# Altium PCB dc driver pcb.PcbDoc
Units mm, origin at the board's own origin, x right, y up, seen from the top; angles counter-clockwise.
Board outline 38.61 x 32.64 mm, 2 copper layers (Top Layer, Bottom Layer); 16 components, 12 nets, 53 pads, 32 vias.
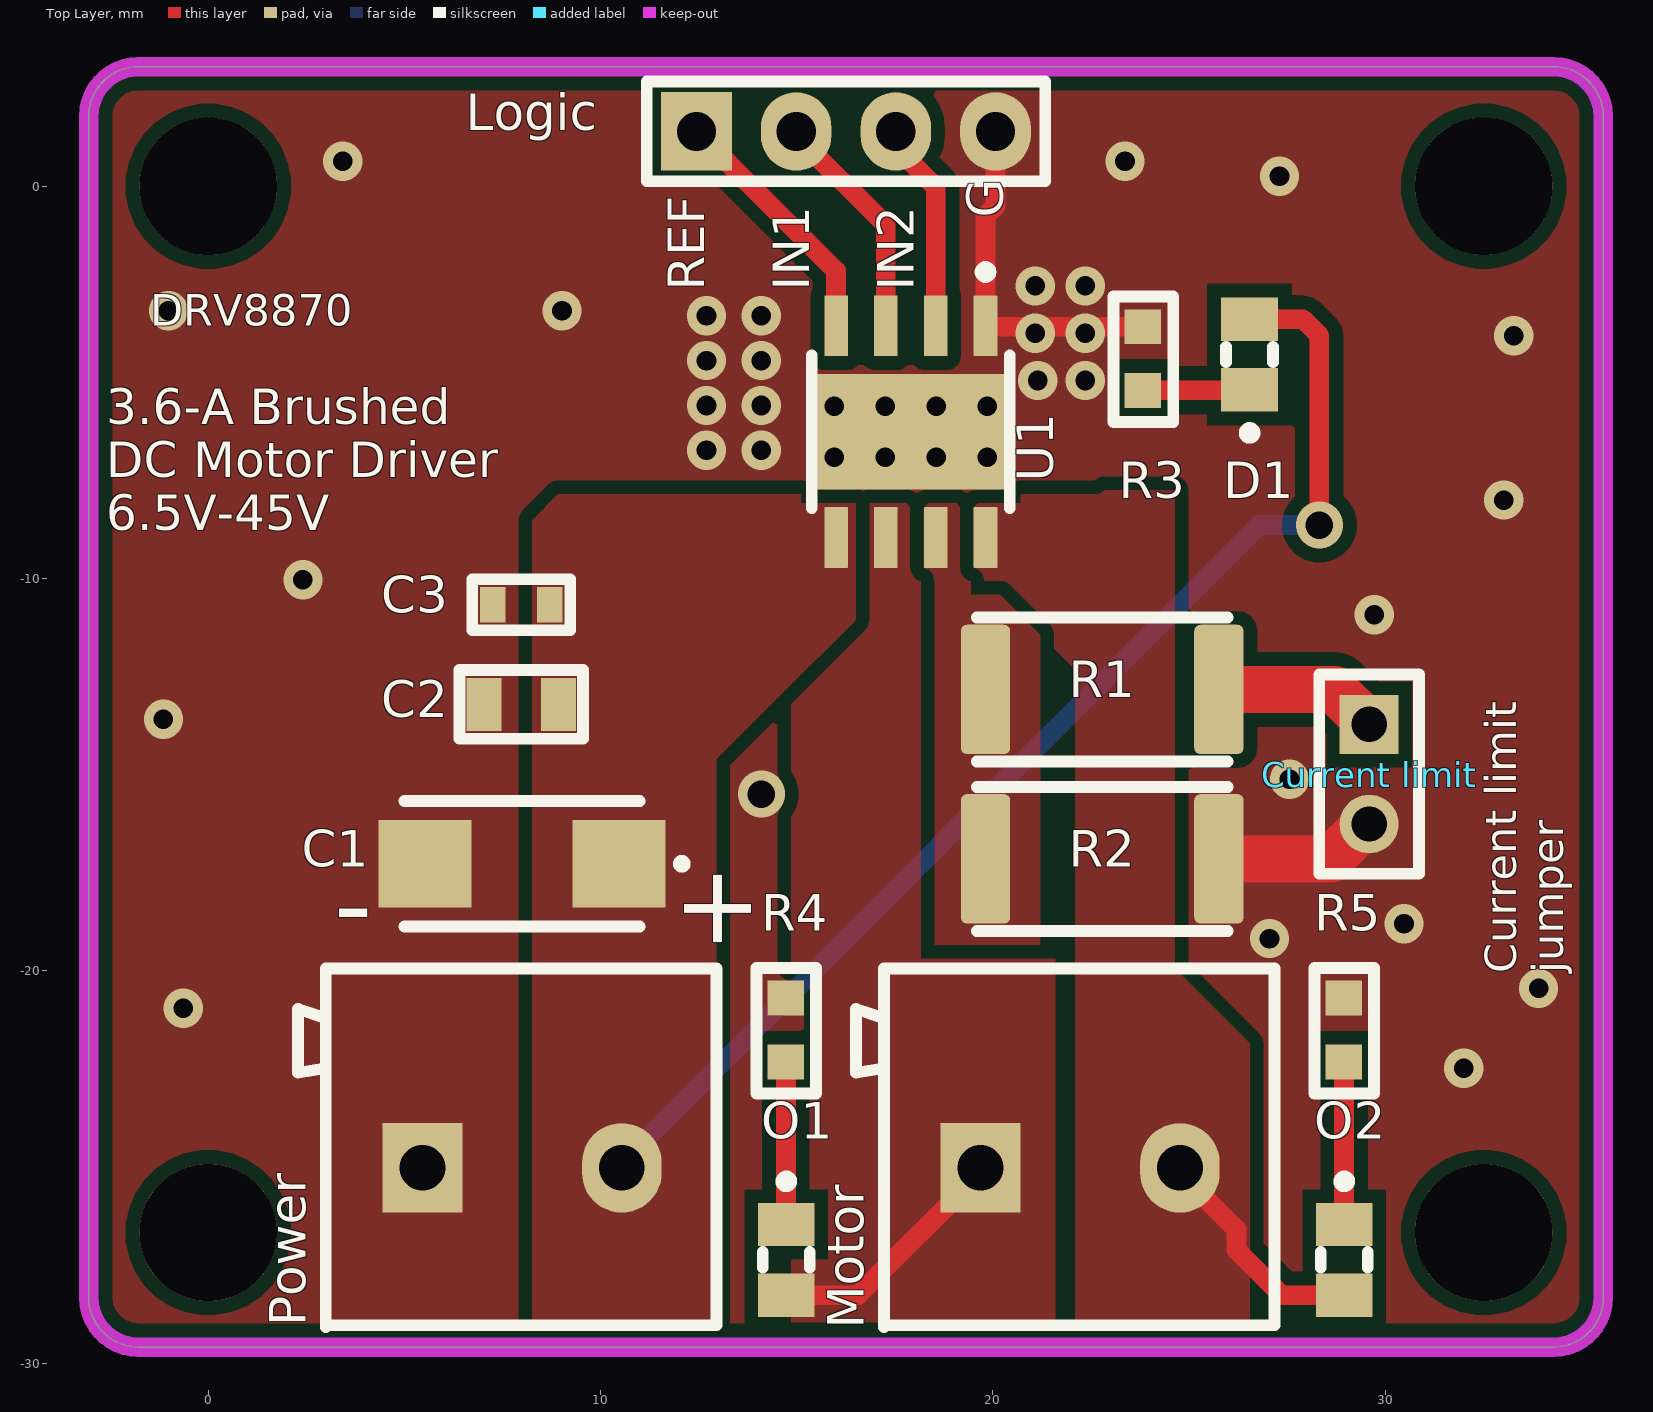
[diagram p0: Top Layer view]
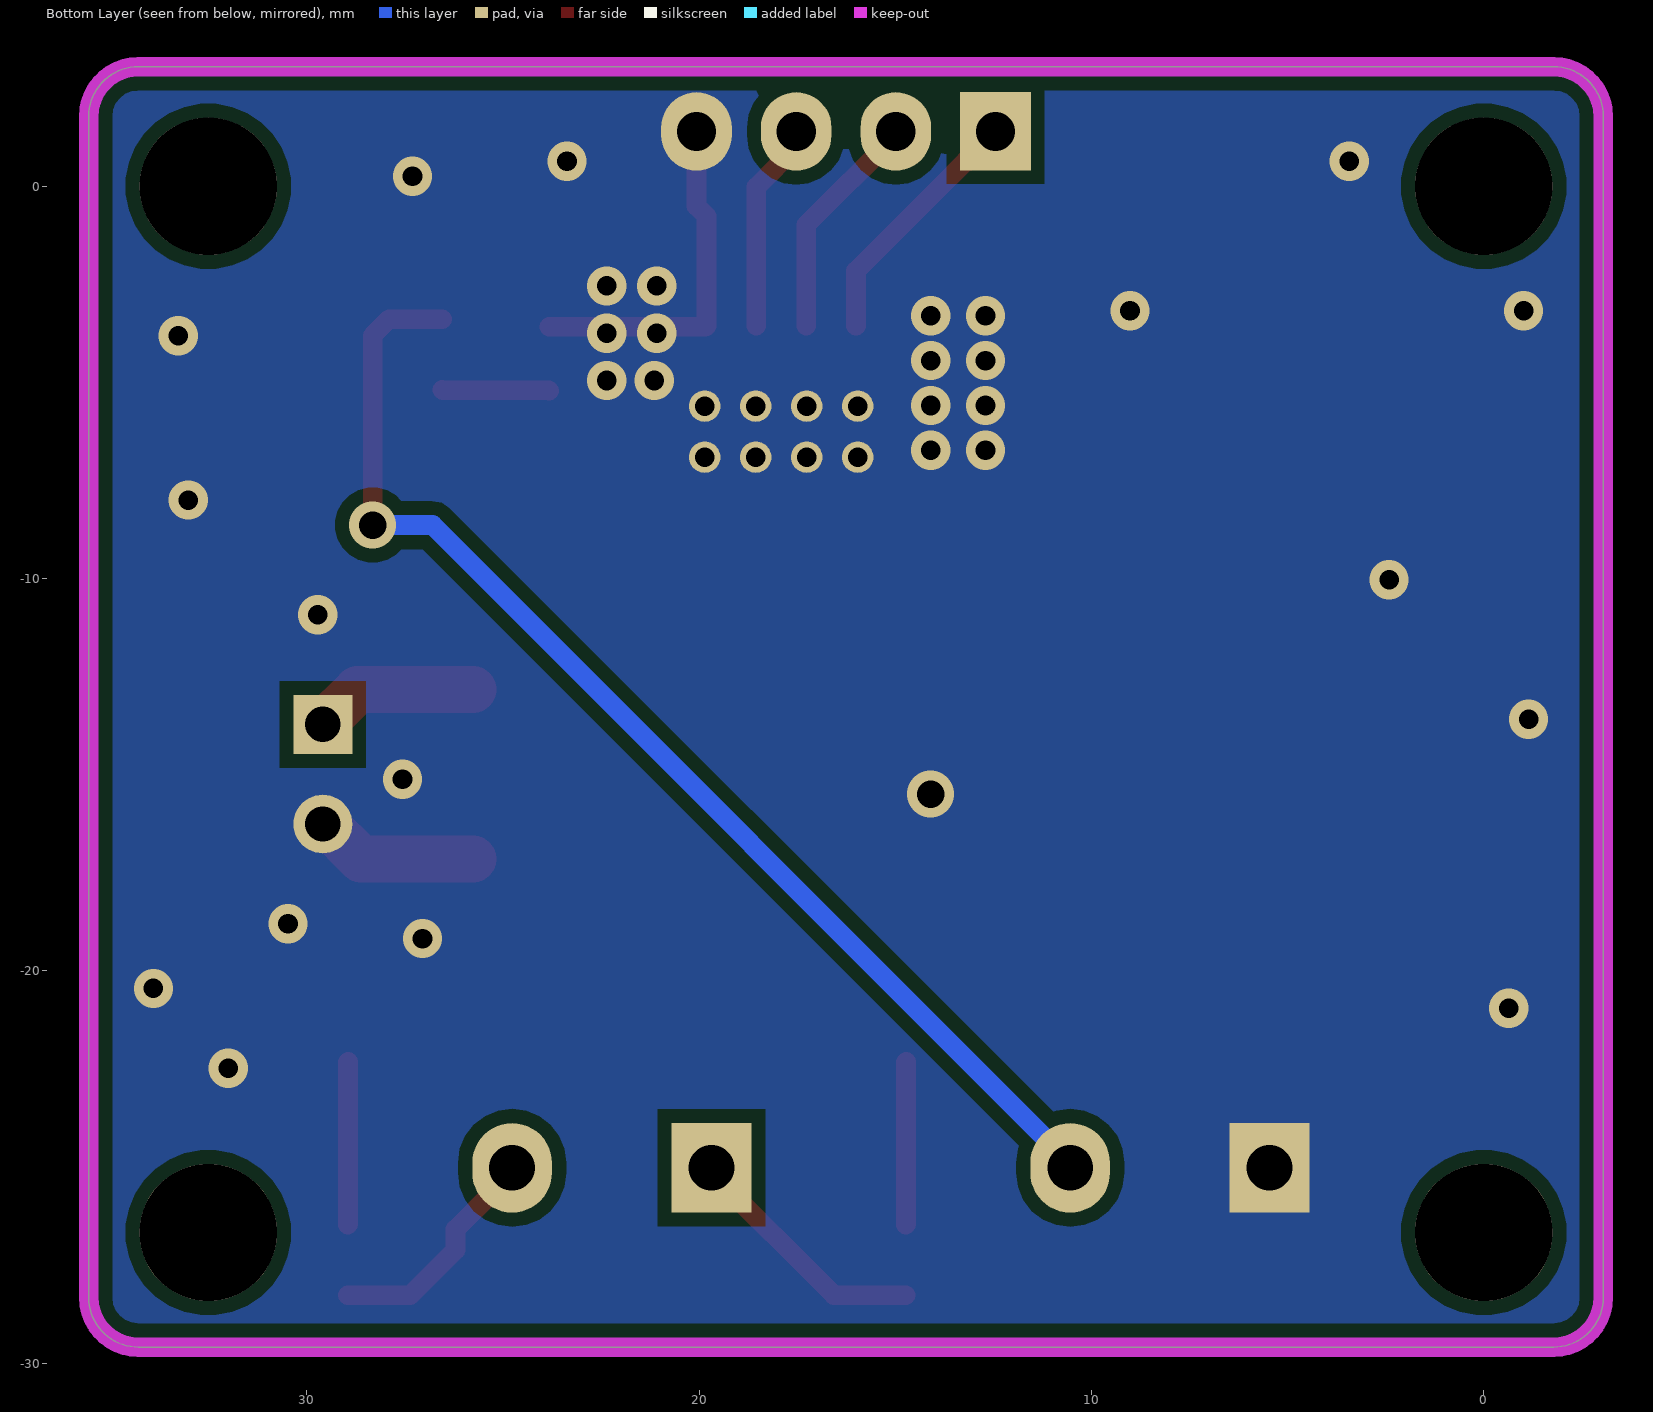
[diagram p1: Bottom Layer view, seen from below]

## Layer stack, top to bottom
Top Solder: solder mask 0.0102, Solder Resist, Dk 3.5
Top Layer: signal copper 0.0356
Dielectric 1: dielectric 0.32, FR-4, Dk 4.8
Bottom Layer: signal copper 0.0356
Bottom Solder: solder mask 0.0102, Solder Resist, Dk 3.5

## Board outline
-3.048,-28.321 ccw(c-1.778,-28.321) -1.778,-29.591 34.29,-29.591 ccw(c34.29,-28.321) 35.56,-28.321 35.56,1.778 ccw(c34.29,1.778) 34.29,3.048 -1.778,3.048 ccw(c-1.778,1.778) -3.048,1.778

## Design rules (kind name [scope] priority, off if disabled: settings)
Clearance Clearance_2 [InNamedPolygon('NONET_L-01_P-001') Or InNamedPolygon('NONET_L-01_P-001') Or InNamedPolygon('NONET_L-01_P-001') Or InNamedPolygon('NONET_L-01_P-001') Or InNamedPolygon('NONET_L-01_P-001')] p1: gap=0.35 ignorepadtopadclearanceinfootprint=FALSE
Clearance Clearance_1 [InNamedPolygon('NONET_L-01_P-001') Or InNamedPolygon('NONET_L-01_P-001')] p2: gap=0.45 ignorepadtopadclearanceinfootprint=FALSE
Clearance [All] p3: gap=0.3 ignorepadtopadclearanceinfootprint=FALSE
PolygonConnect PolygonConnect_2 [All vs IsNamedPolygon('NONET_L-01_P-001') Or IsNamedPolygon('NONET_L-01_P-001') Or IsNamedPolygon('NONET_L-01_P-001') Or IsNamedPolygon('NONET_L-01_P-001') Or IsNamedPolygon('NONET_L-01_P-001')] p1: connectstyle=Direct reliefconductorwidth=0.254 reliefentries=4 polygonreliefangle="90 Angle" airgapwidth=0.254
PolygonConnect PolygonConnect_1 [All vs IsNamedPolygon('NONET_L-01_P-001') Or IsNamedPolygon('NONET_L-01_P-001')] p2: thpad.connectstyle=Relief thpad.reliefconductorwidth=0.5 thpad.reliefentries=4 thpad.polygonreliefangle="45 Angle" thpad.airgapwidth=0.4 smdpad.connectstyle=Relief smdpad.reliefconductorwidth=0.5 smdpad.reliefentries=4 smdpad.polygonreliefangle="90 Angle" smdpad.airgapwidth=0.4 via.connectstyle=Direct via.reliefconductorwidth=0.254 via.reliefentries=4 via.polygonreliefangle="90 Angle" via.airgapwidth=0.254
PolygonConnect [All] p3: connectstyle=Relief reliefconductorwidth=0.254 reliefentries=4 polygonreliefangle="90 Angle" airgapwidth=0.254
RoutingVias [All] p1: holewidth=0.711 width=1.27 viastyle="Through Hole" minholewidth=0.711 minwidth=1.27 maxholewidth=0.711 maxwidth=1.27
SolderMaskExpansion [All] p1: expansion=0.102 istentingtop=FALSE
Width [All] p1: maxlimit=3 minlimit=0.2 preferedwidth=0.3 minimp=50.000000 maximp=50.000000 favimp=50.000000
30 further rules are at their usual default settings.

## Components (designator, comment, footprint, x,y, rotation, side; value= is the part's Value field where it differs from the comment)
C1 "T491C106K035AT7280" T491C 8.001,-17.272 r180 top
C2 "1uF" CAP0805 1.665,-15.868 r0 top
C3 "100nF" CAP0603 4.837,-12.236 r0 top
"Current limit" "jumper" HDR1X2 29.591,-13.716 r270 top
D1 "597-3305-607F" LEDC2012X70N 26.543,-4.289 r90 top
Logic "Header 4" HDR1X4 12.446,1.397 r0 top
Motor "2Pin_Terminal" 2Pin_Terminal -10.541,-33.401 r0 top (schematic designator DC_M1)
O1 "597-3305-607F" LEDC2012X70N 14.732,-27.366 r270 top
O2 "597-3305-607F" LEDC2012X70N 28.956,-27.366 r270 top
Power "2Pin_Terminal" 2Pin_Terminal -24.765,-33.401 r0 top
R1 "0R2" RESC6432X60N 22.787,-12.827 r0 top
R2 "0R2" RESC6432X60N 22.787,-17.145 r0 top
R3 "10 k" 603res 23.876,-4.572 r270 top
R4 "10 k" 603res 14.772,-21.685 r270 top
R5 "10 k" 603res 28.996,-21.685 r270 top
U1 "DRV8870DDA" "motor driver" 20.813,-1.699 r0 top

## Footprints (in the part's own frame and the unit in brackets; to place one, negate y for a bottom-side part, rotate by r counter-clockwise, add the part's x,y. Pads: shape width x height; smd on the part's side, far side on the other; paste and mask are expansions set on the pad)
2Pin_Terminal [mil]
  rect 80x90 hole 46: 1(1190,330)
  oval 80x90 hole 46: 2(1390,330)
  silkscreen extent 1065,170 1485,530, body extent 1063,173 1485,530, height 493
603res [mm]
  rect 0.89x0.93 smd: 1(-0.991,-0.052) 2(0.637,-0.052)
  silkscreen extent -1.76,-0.8 1.44,0.72, body extent -0.98,-0.45 0.62,0.35, height 0.55
CAP0603 [mm]
  rect 0.65x0.9 smd: 1(2.417,1.568) 2(3.867,1.568)
  silkscreen extent 1.89,0.92 4.39,2.22, body extent 2.32,1.14 3.97,1.99, height 0.4
CAP0805 [mm]
  rect 0.9x1.35 smd: 1(5.364,2.66) 2(7.264,2.66)
  silkscreen extent 4.74,1.79 7.89,3.53, body extent 5.29,2.01 7.34,3.31, height 0.5
HDR1X2 [mm] "Connector; Header; 2 Position"
  rect 1.5x1.5 hole 0.9: 1(0,0)
  round 1.5 hole 0.9: 2(2.54,0)
  silkscreen extent -1.27,-1.27 3.81,1.27
HDR1X4 [mm] "Connector; Header; 4 Position"
  rect 1.8x2 hole 1: 1(0,0)
  oval 1.8x2 hole 1: 2(2.54,0) 3(5.08,0) 4(7.62,0)
  silkscreen extent -1.27,-1.27 8.89,1.27
LEDC2012X70N [mm]
  rect 1.1x1.45 smd: A(0.9,0) C(-0.9,0)
  silkscreen extent -2.1,-0.6 0.2,0.6, body extent -1,-0.63 1,0.63, height 0.7
"motor driver" [mm]
  rrect5% 0.6x1.55 smd mask+0: 1(-1.001,-1.857) 2(-2.271,-1.857) 3(-3.541,-1.857) 4(-4.811,-1.857) 5(-4.811,-7.257) 6(-3.541,-7.257) 7(-2.271,-7.257) 8(-1.001,-7.257)
  rect 4.9x2.95 smd paste-3 mask+0: 9(-2.906,-4.557)
  round 0.8 hole 0.5: 10(-0.956,-3.907) 11(-0.956,-5.207) 12(-2.256,-3.907) 13(-2.256,-5.207) 14(-3.556,-3.907) 15(-3.556,-5.207) 16(-4.856,-3.907) 17(-4.856,-5.207)
  silkscreen extent -5.43,-6.51 -0.38,-0.39, body extent -5.36,-7.56 -0.46,-1.56, height 1.7
RESC6432X60N [mm]
  rrect25% 1.26x3.3 smd: 1(-2.975,0) 2(2.975,0)
  silkscreen extent -3.2,-1.84 3.2,1.84
T491C [mm]
  rect 2.37x2.23 smd: 1(-2.47,0) 2(2.47,0)
  silkscreen extent -4.12,-1.6 3,1.6, body extent -3.15,-1.75 3.15,1.75, height 2.81

## Part data
C1: "Capacitor Polarised", Manufacturer_Name=KEMET, Mouser Part Number=80-T491C106K035AT, Arrow Part Number=T491C106K035AT7280, Arrow Price/Stock=https://www.arrow.com/en/products/t491c106k035at7280/kemet-corporation?region=nac, Datasheet Link=https://content.kemet.com/datasheets/KEM_T2005_T491.pdf, Height=2.8mm, Manufacturer_Part_Number=T491C106K035AT7280, Mouser Price/Stock=https://www.mouser.co.uk/ProductDetail/KEMET/T491C106K035AT7280?qs=xy9o06WtvdC%2Fe0IkQj9vgQ%3D%3D
C2: library part 0.1u_4, "CAP0805", Manufacturer Part=?, nameAlias=Value(F), spicePre=C, spiceSymbolName=Capacitor
C3: library part 0.1u, "CAP0603", Manufacturer Part=?, nameAlias=Value(F), spicePre=C, spiceSymbolName=Capacitor
"Current limit": library part "Header 2", "Header, 2-Pin", LatestRevisionDate=17-Jul-2002, LatestRevisionNote="Re-released for DXP Platform.", Publisher="Altium Limited"
D1 O1 O2: "LED Uni-Color Green 4-Pin Chip 0805 T/R", Package=None, Availability=Unavailable, MP=597-3305-607F, Price=None
Logic: "Header, 4-Pin", LatestRevisionDate=17-Jul-2002, LatestRevisionNote="Re-released for DXP Platform.", Publisher="Altium Limited"
R1 R2: library part TLR3A20DR004FTDG, "Metal Strip Smnt Fixed Resistor 2512 Case 4mOhm +/-1% 2W +/-50ppm/degC", Package=None, Availability=Unavailable, MP=TLR3A20DR004FTDG, Price=None
R3 R4 R5: library part RN731JTTD3701D25, "603 Resistor", Package=None, Availability=Unavailable, MP=RN731JTTD3701D25, Price=None
U1: Package=None, Availability=Unavailable, MP=DRV8870DDA, Price=None

## Free pads (board coordinates)
  round 3.5 hole 3.5: 1(32.512,0) 2(32.512,-26.67) 3(0,-26.67) 4(0,0)

## Via types
v1: diameter 1, hole 0.5, Top Layer to Bottom Layer, tented both sides, 30 vias
v2: diameter 1.2, hole 0.7, Top Layer to Bottom Layer, tented both sides, 2 vias

## Nets (pads, with @x,y where several pads share a name; then routed paths per layer and width w, separated by ;. In a path a pad name is that pad's centre, name@x,y a point inside that pad or via, vN(x,y) a via of type N, cw(c..) or ccw(c..) an arc to the next point about the centre after c; other vN are vias at no path point)
GND: "Current limit.2" C1.2 C2.1 C3.1 Logic.4 Power.1 R2.2 R3.1 R4.1 R5.1 U1.1 U1.9 U1.10 U1.11 U1.12 U1.13 U1.14 U1.15 U1.16 U1.17 | length 13.3
  Top Layer w0.5: Logic.4 20.066,-0.508 19.812,-0.762 U1.1 19.837,-3.581 R3.1
  Top Layer w1.2: R2.2 28.621,-17.145 29.51,-16.256 29.591,-16.256
  other v1: 32.004,-22.479 -0.635,-20.955 33.909,-20.447 27.051,-19.177 30.48,-18.796 27.559,-15.113 -1.143,-13.589 29.718,-10.922 2.413,-10.033 33.02,-8.001 12.7,-6.731 14.097,-6.731 12.7,-5.588 14.097,-5.588 21.145,-4.953 22.352,-4.953 12.7,-4.445 14.097,-4.445 33.274,-3.81 21.082,-3.746 22.352,-3.746 12.7,-3.302 14.097,-3.302 -1.016,-3.175 9.017,-3.175 21.082,-2.54 22.352,-2.54 27.305,0.254 3.429,0.635 23.368,0.635
  other v2: 14.097,-15.494
in1: Logic.2 U1.3 | length 5.9
  Top Layer w0.5: Logic.2 14.986,1.297 17.272,-0.989 U1.3
in2: Logic.3 U1.2 | length 5.4
  Top Layer w0.5: Logic.3 17.526,0.996 18.542,-0.02 U1.2
"NetCurrent limit_1": "Current limit.1" R1.2 | length 4.2
  Top Layer w1.2: R1.2 28.702,-12.827 29.591,-13.716
NetD1_C: D1.C R3.2 | length 2.7
  Top Layer w0.5: R3.2 23.834,-5.199 26.533,-5.199 D1.C
NetO1_C: O1.C R4.2 | length 4.1
  Top Layer w0.5: R4.2 14.726,-22.329 14.726,-26.46 O1.C
NetO2_C: O2.C R5.2 | length 4.1
  Top Layer w0.5: R5.2 28.95,-22.329 28.95,-26.46 O2.C
NetR1_1: R1.1 R2.1 U1.7
o1: Motor.1 O1.A U1.6 | length 6.4
  Top Layer w0.5: O1.A 16.565,-28.266 19.685,-25.146 Motor.1
o2: Motor.2 O2.A U1.8 | length 5.9
  Top Layer w0.5: Motor.2 24.765,-25.146 26.209,-26.59 26.209,-27.116 27.36,-28.266 O2.A
VBATT: C1.1 C2.2 C3.2 D1.A Power.2 U1.5 | length 31.4
  Top Layer w0.5: D1.A 27.9,-3.389 28.321,-3.81 v2(28.321,-8.636)
  Bottom Layer w0.5: Power.2 10.541,-24.892 26.797,-8.636 v2(28.321,-8.636)
vref: Logic.1 U1.4 | length 6.5
  Top Layer w0.5: Logic.1 12.446,1.297 13.096,0.647 13.196,0.647 16.002,-2.159 U1.4

## Polygon pours and split planes (outlines as drawn)
GND on Top Layer "NONET_L-01_P-001" (solid, remove dead copper, pour order 7): 34.29,3.048 35.433,1.905 35.433,-28.956 34.925,-29.464 -2.159,-29.464 -3.048,-28.575 -2.921,-28.448 -2.921,2.159 -2.032,3.048
GND on Top Layer "NONET_L-01_P-001" (solid, remove dead copper, pour order 5): 19.177,-2.794 19.177,-4.826 4.826,-4.826 2.921,-6.867 2.921,-29.083 7.366,-29.083 7.366,-8.636 8.509,-7.493 22.606,-7.493 22.606,-2.794
VBATT on Top Layer "NONET_L-01_P-001" (solid, remove dead copper, pour order 4): 16.51,-7.747 9.017,-7.747 8.255,-8.509 8.255,-29.083 12.954,-29.083 12.954,-14.605 16.51,-11.049
NetR1_1 on Top Layer "NONET_L-01_P-001" (solid, remove dead copper, pour order 3): 18.161,-7.747 19.431,-7.747 19.431,-10.414 20.193,-10.414 21.209,-11.43 21.209,-19.431 18.161,-19.431
o2 on Top Layer "NONET_L-01_P-001" (solid, remove dead copper, pour order 2): 19.431,-7.747 24.638,-7.747 24.638,-19.939 26.543,-21.844 26.543,-28.956 22.098,-28.956 22.098,-12.319 20.193,-10.414 19.431,-10.414
o1 on Top Layer "NONET_L-01_P-001" (solid, remove dead copper, pour order 1): 14.859,-7.747 14.859,-28.956 21.59,-28.956 21.59,-19.685 18.161,-19.685 18.161,-7.747
GND on Bottom Layer "NONET_L-01_P-001" (solid, remove dead copper, pour order 6): 34.29,3.048 35.433,1.905 35.433,-28.956 34.925,-29.464 -2.159,-29.464 -3.048,-28.575 -2.921,-28.448 -2.921,2.159 -2.032,3.048

## Keep-outs
Keep-Out Layer:
  lines w0.5: -3.048,-28.321 ccw(c-1.778,-28.321) -1.778,-29.591 34.036,-29.591 34.29,-29.591 ccw(c34.29,-28.321) 35.56,-28.321 35.56,1.778 ccw(c34.29,1.778) 34.29,3.048 -1.778,3.048 ccw(c-1.778,1.778) -3.048,1.778 -3.048,-28.321

## Silkscreen, mask and mechanical layers (free items; w line width, h text height)
Top Overlay:
  text "G" at 20.574,-0.804 h1.6 r90
  text "REF" at 12.954,-2.666 h1.6 r90
  text "IN1" at 15.621,-2.666 h1.6 r90
  text "IN2" at 18.288,-2.67 h1.6 r90
  text "DRV8870" at -1.474,-3.556 h0.8
  text "3.6-A Brushed  / DC Motor Driver / 6.5V-45V" at -2.603,-8.763 h0.9
  text "-" at 4.191,-17.78 h2 r180
  text "+" at 13.843,-19.558 h2 r90
  text "Current limit  / jumper" at 34.544,-20.066 h0.8 r90

## Dimensions
34.29,3.048 to 34.036,-29.591 on Top Overlay
35.56,1.778 to -3.048,1.778 on Top Overlay